# Altium PCB Telemetry_Module_old.PcbDoc (part 1 of 2)
Units mm, origin at the board's own origin, x right, y up, seen from the top; angles counter-clockwise.
Board outline 50 x 50 mm, 4 copper layers (Top Layer, GND, Power, Bottom Layer), stack 0.603 mm thick; 94 components, 68 nets, 386 pads, 193 vias.
Unrouted connection lines stored in the file: 22.
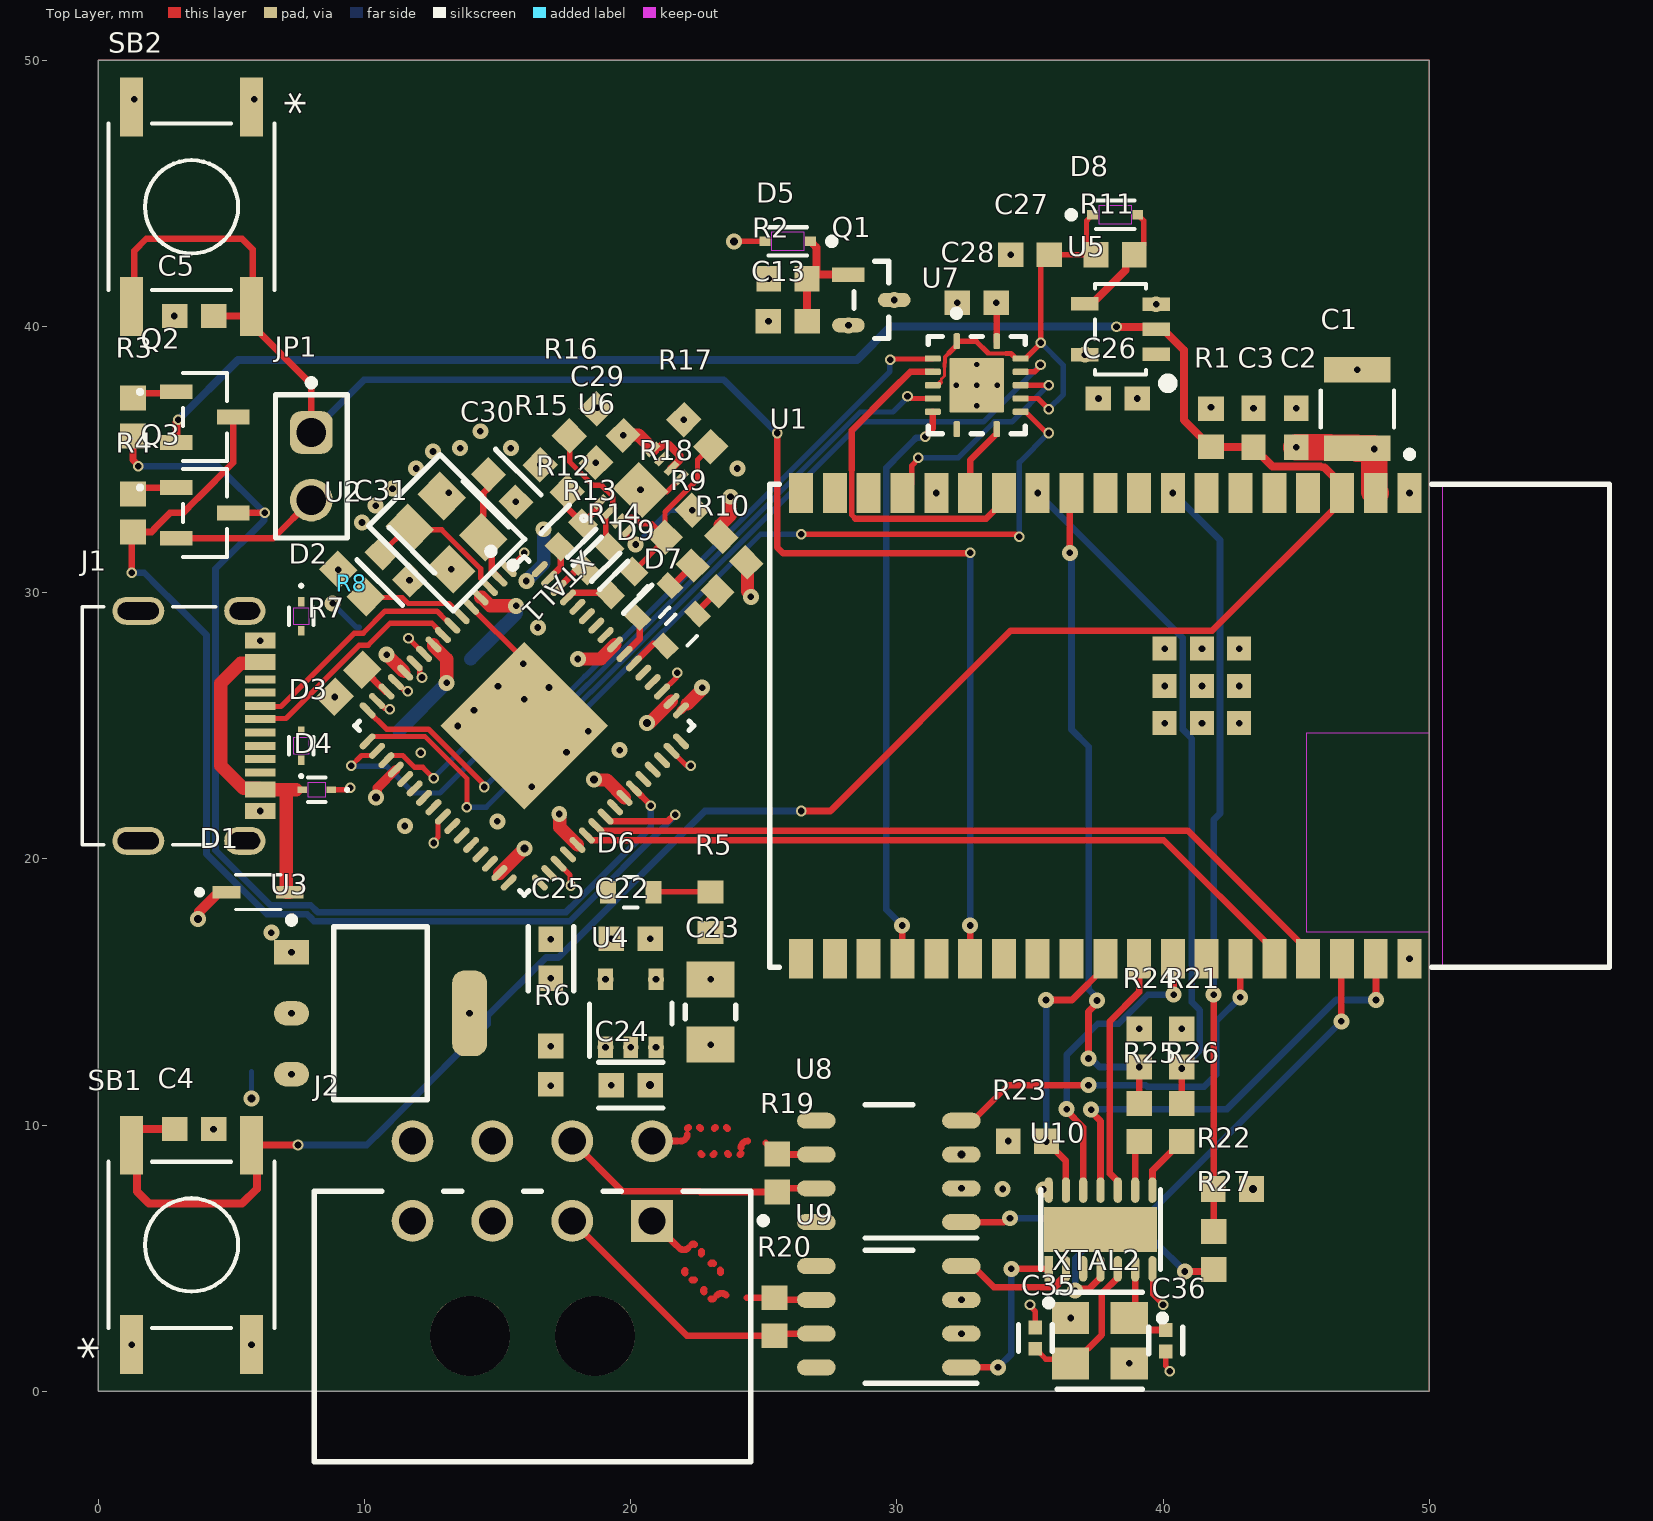
[diagram p0: Top Layer view]
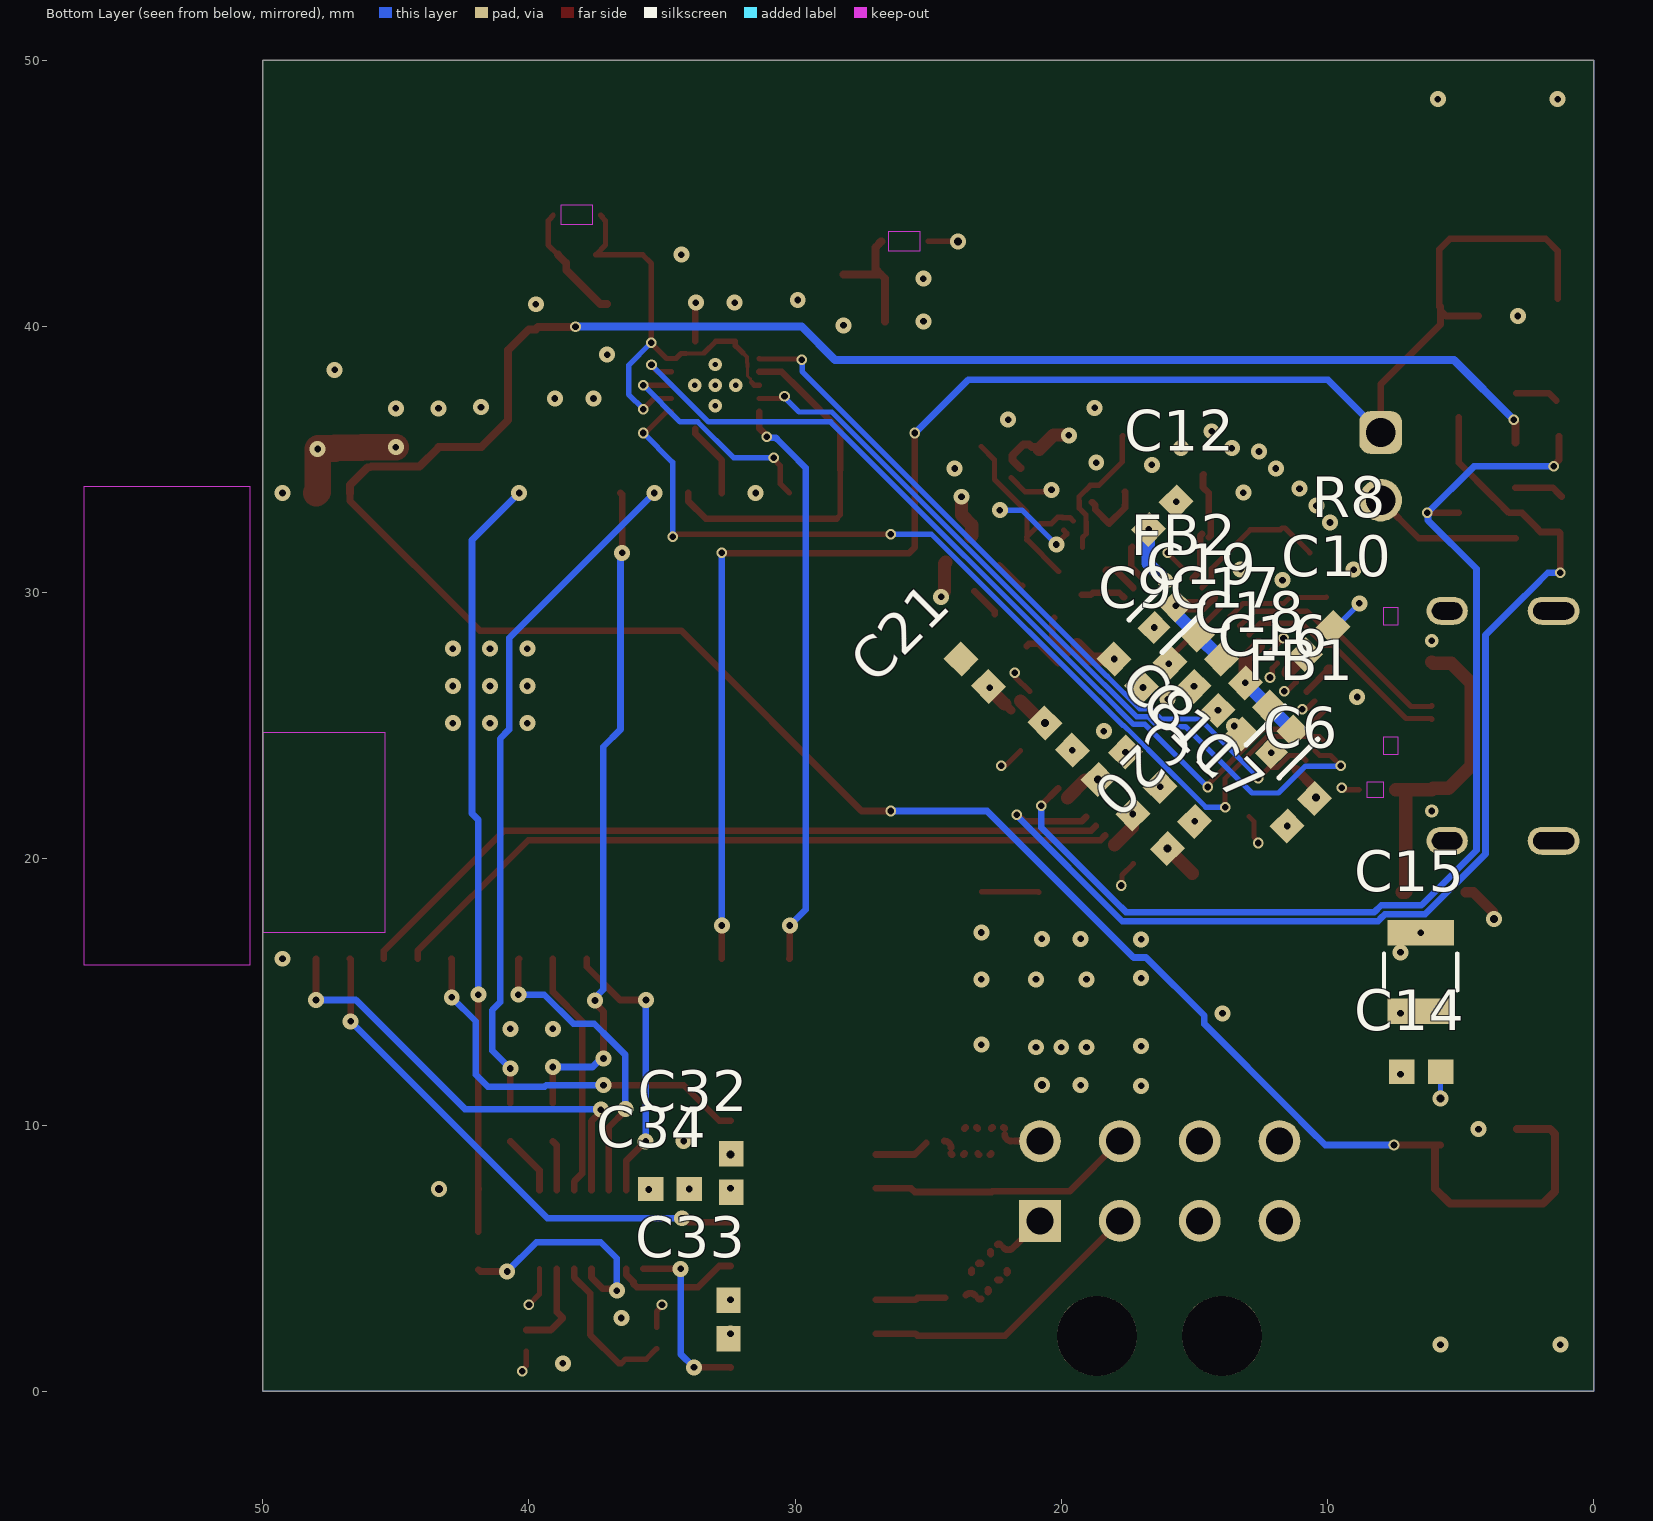
[diagram p1: Bottom Layer view, seen from below]
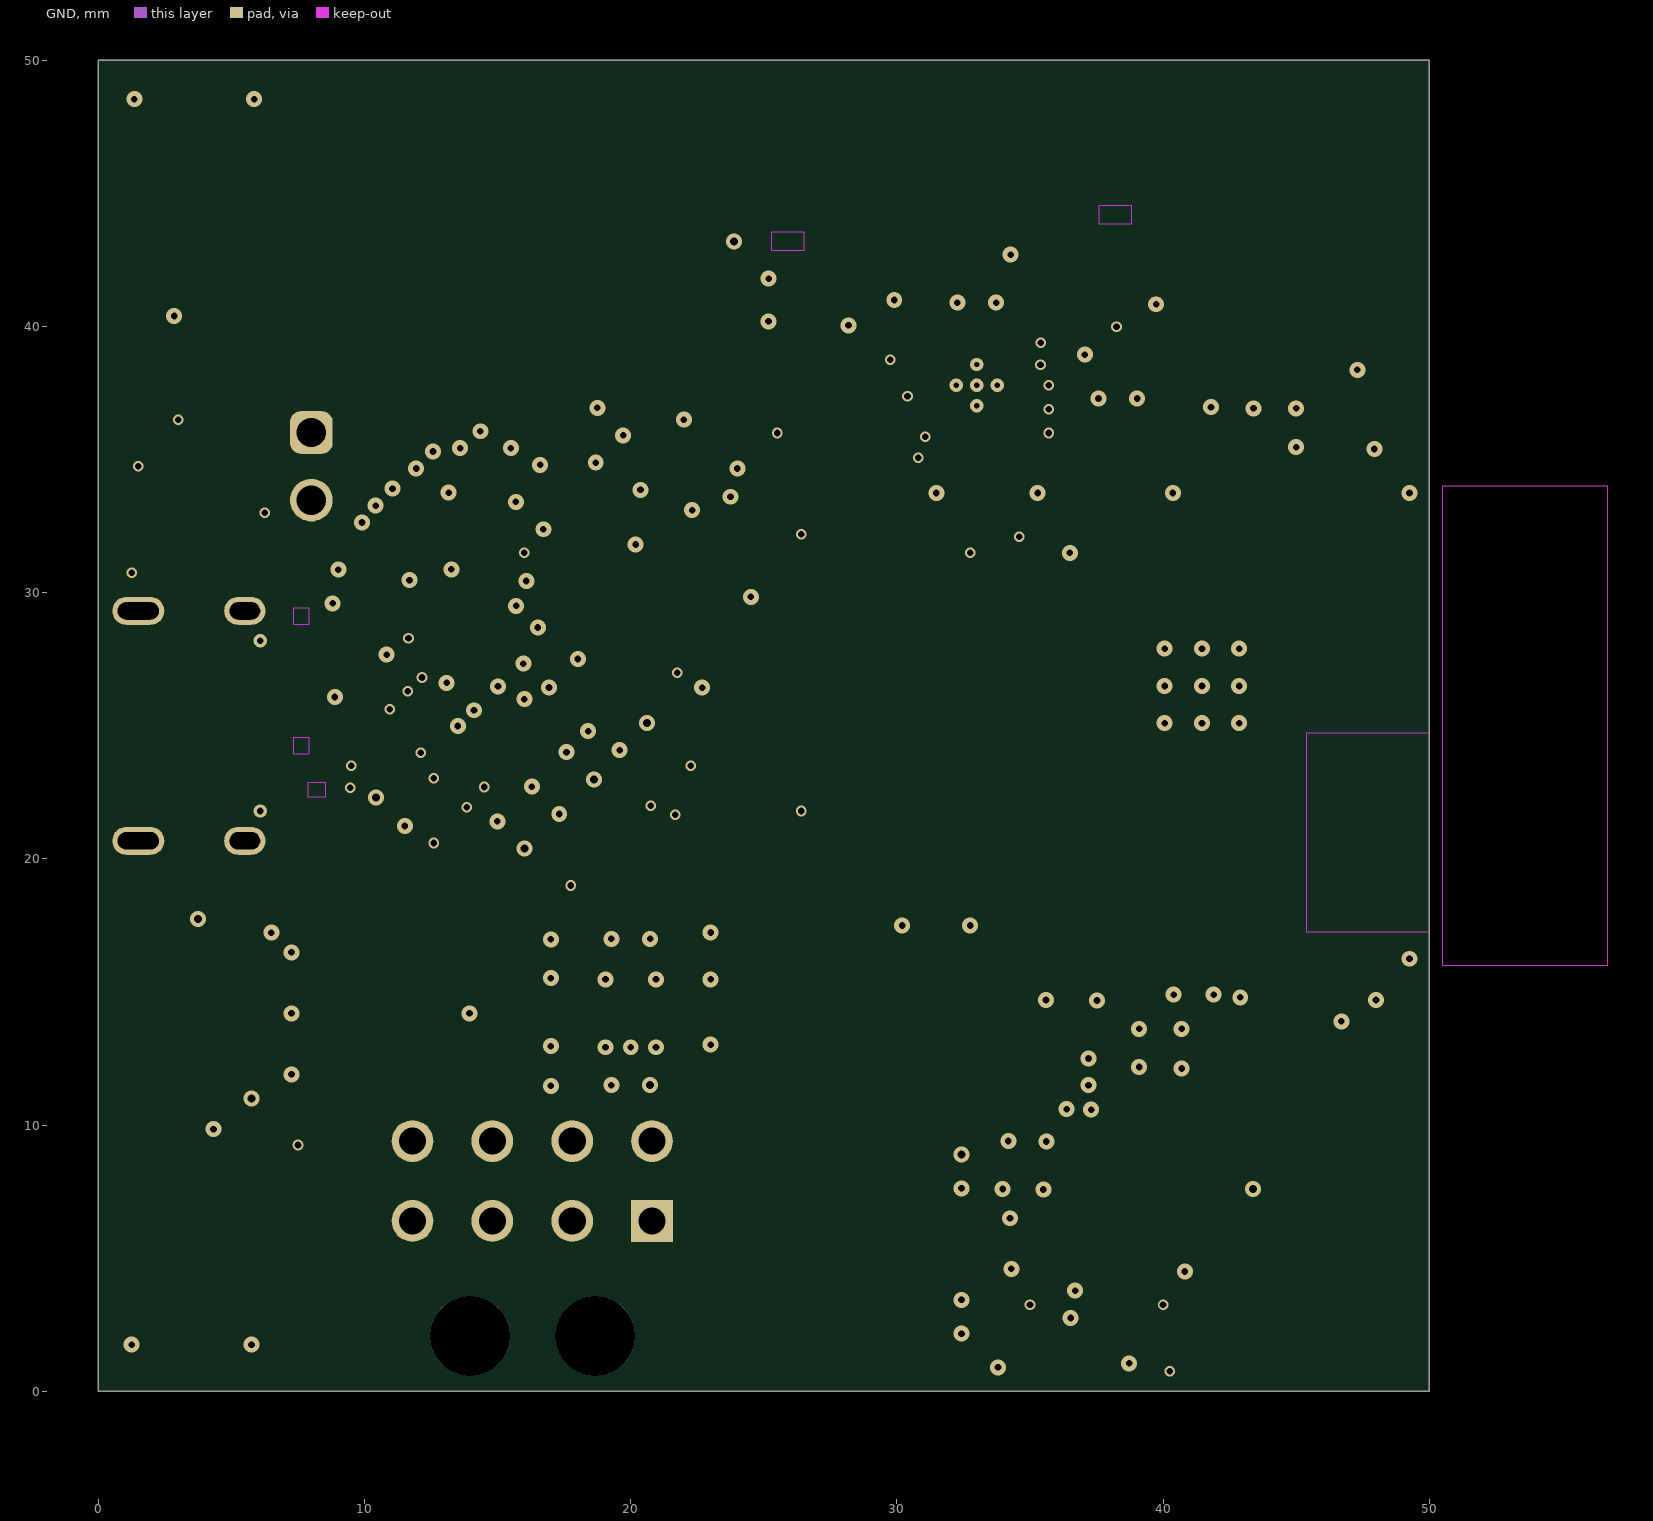
[diagram p2: GND]
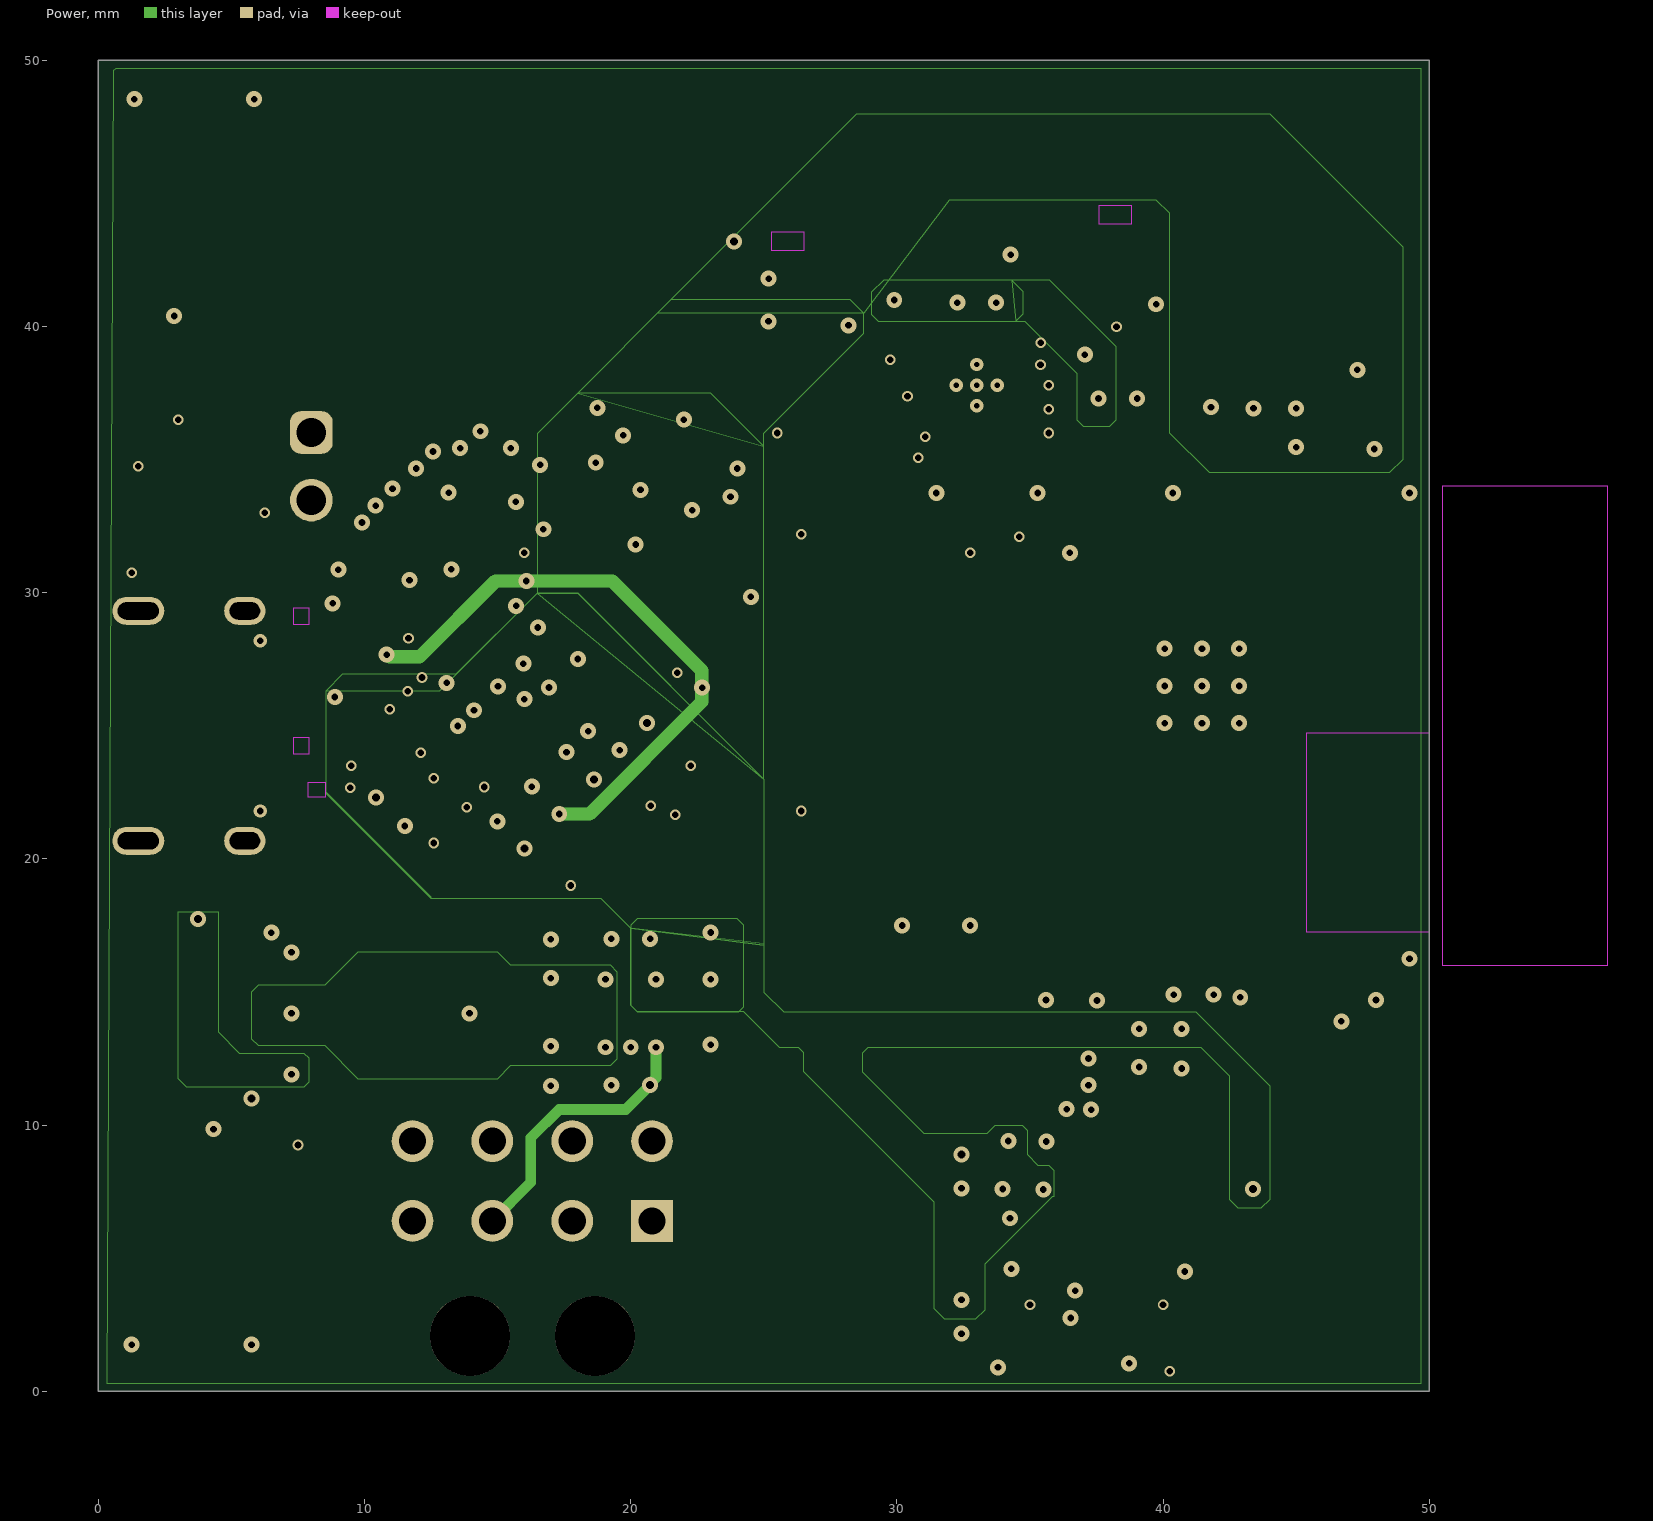
[diagram p3: Power]
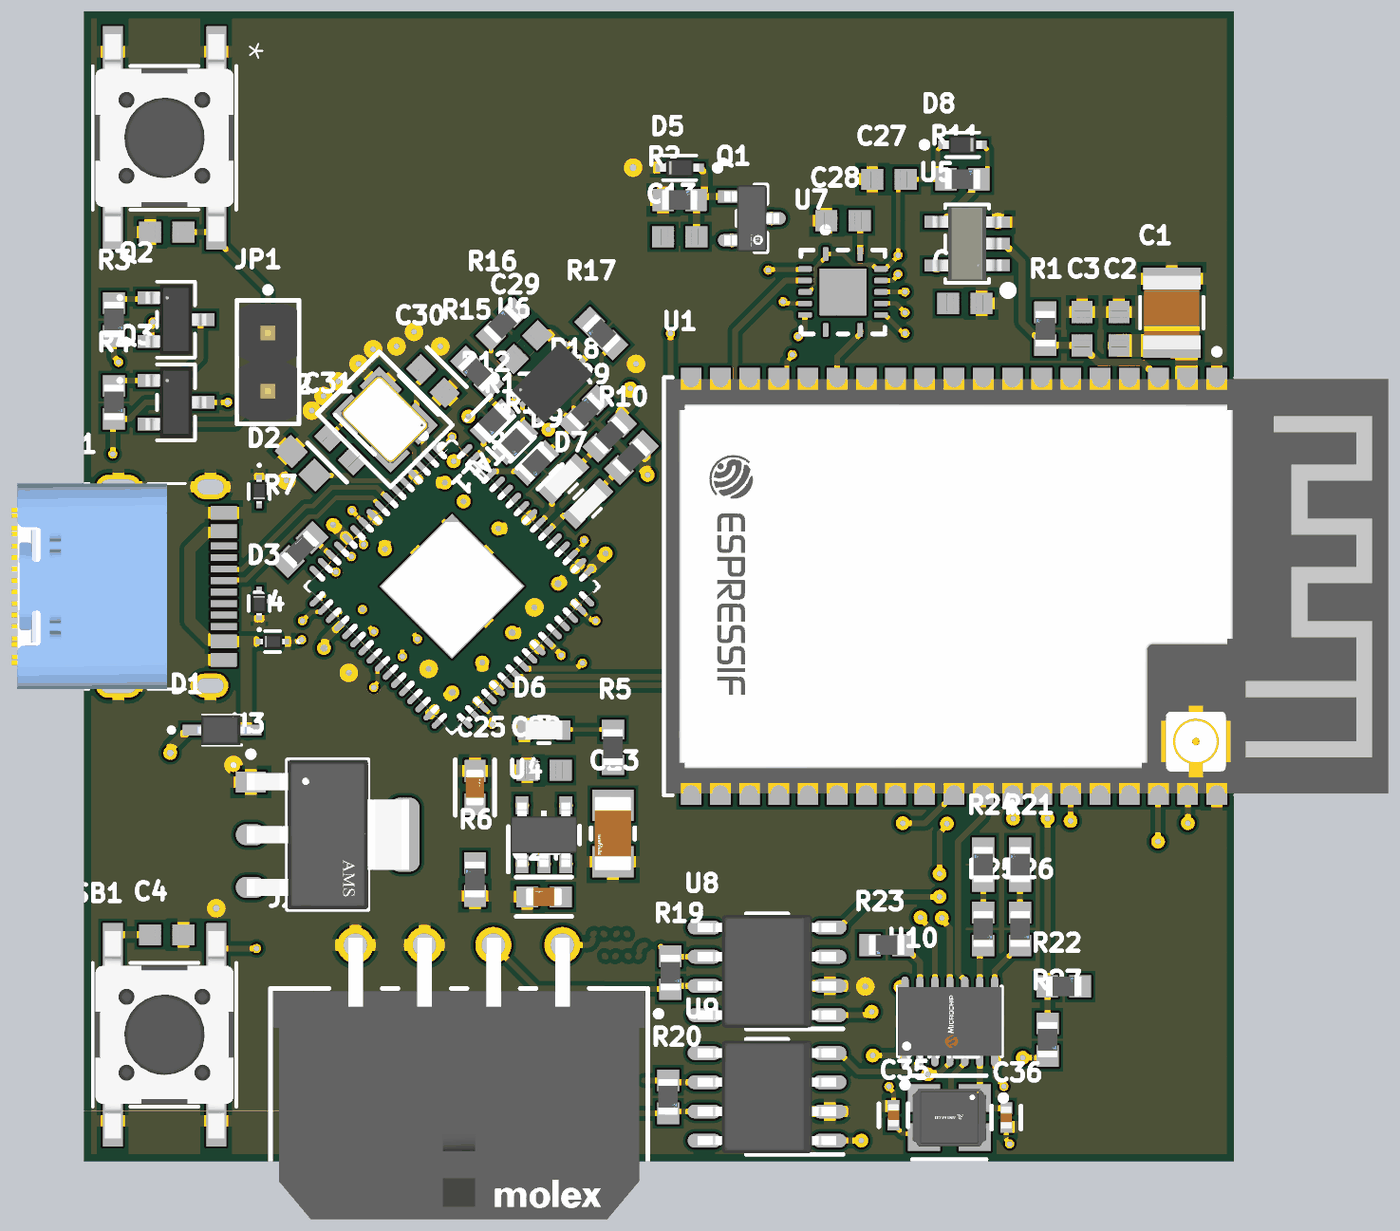
[diagram p5: 3D render of the assembled board from above, using the file's embedded part models]
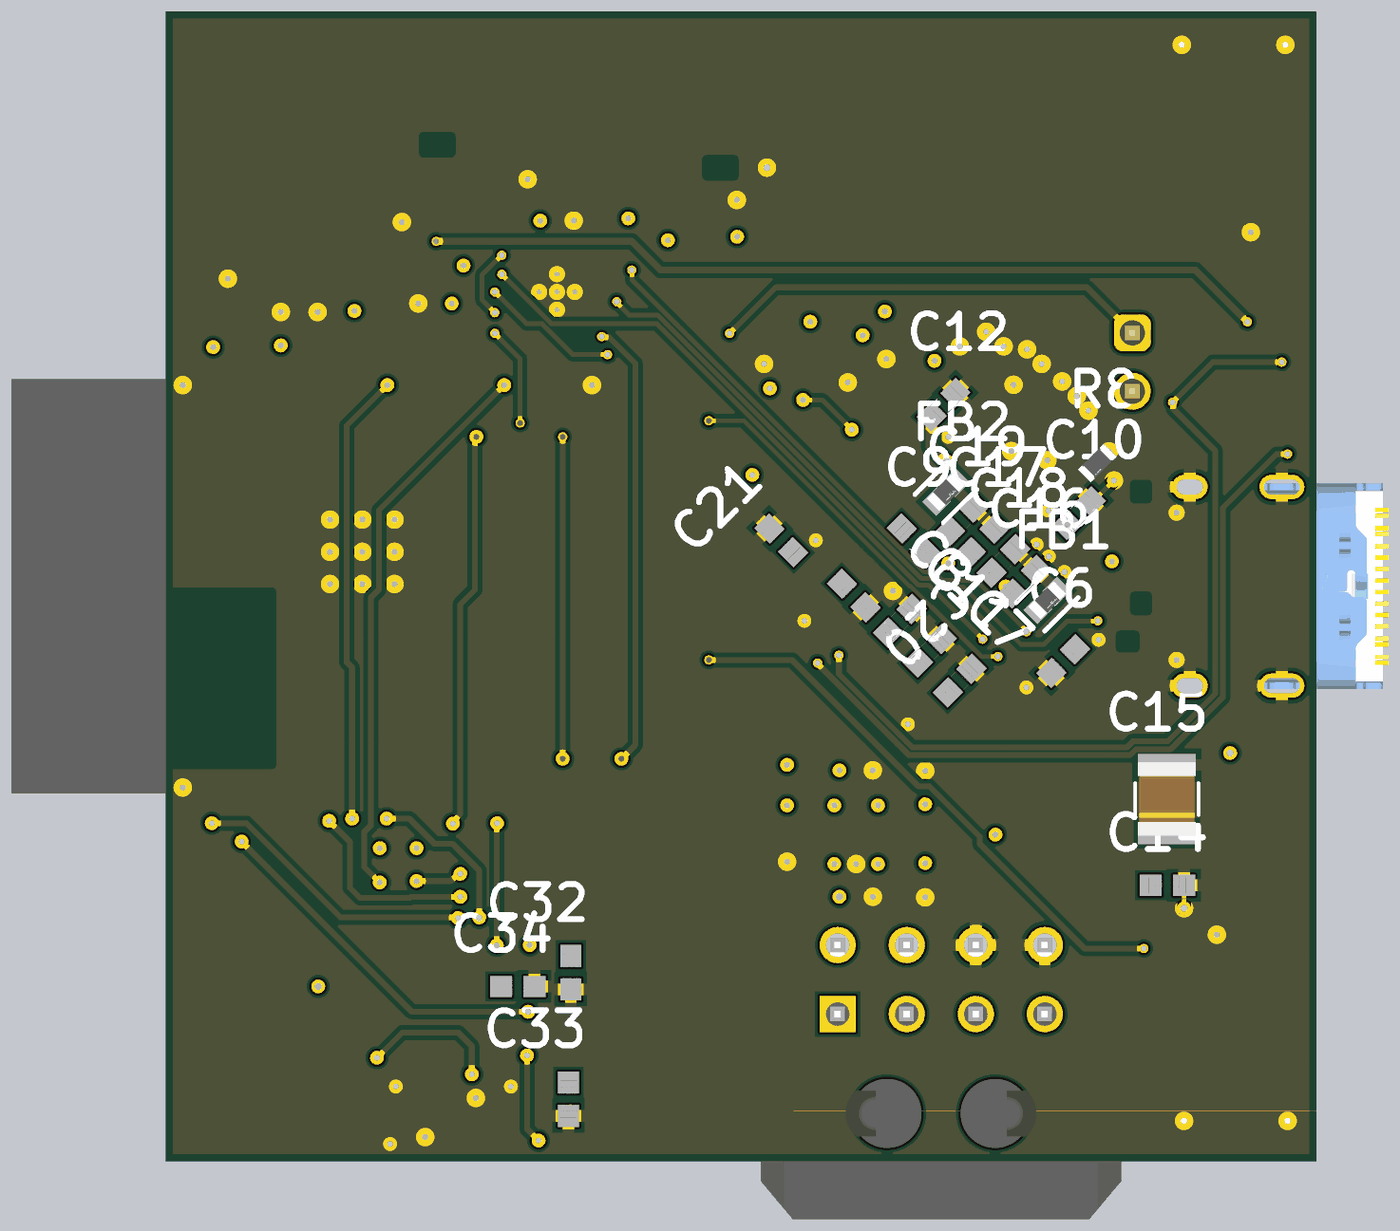
[diagram p6: 3D render of the assembled board from below, using the file's embedded part models]

## Layer stack, top to bottom
Top Solder: solder mask 0.0102, Solder Resist, Dk 3.5
Top Layer: signal copper 0.0356
Dielectric 2: prepreg 0.0711, PP-006, Dk 4.1
GND: signal copper 0.035
Dielectric 1: dielectric 0.32, FR-4, Dk 4.8
Power: signal copper 0.035
Dielectric 3: prepreg 0.0711, PP-006, Dk 4.1
Bottom Layer: signal copper 0.0356
Bottom Solder: solder mask 0.0102, Solder Resist, Dk 3.5

## Board outline
0,0 0,50 50,50 50,0

## Design rules (kind name [scope] priority, off if disabled: settings)
BoardOutlineClearance [All] p1: gap=0.3 ignorepadtopadclearanceinfootprint=FALSE except(0.4: Arc-SplitBarrior Arc-SplitContinuation Track-SplitBarrior Track-SplitContinuation SMDPad-SplitBarrior SMDPad-SplitContinuation THPad-SplitBarrior THPad-SplitContinuation Via-SplitBarrior Via-SplitContinuation Fill-SplitBarrior Fill-SplitContinuation Poly-SplitBarrior Poly-SplitContinuation Region-SplitBarrior Region-SplitContinuation Text-SplitBarrior Text-SplitContinuation)
Clearance "Clearance Different Nets" [All] p1: gap=0.2 ignorepadtopadclearanceinfootprint=TRUE except(0.089: Arc-Arc Arc-Track Arc-SMDPad Track-Track Track-SMDPad; 0.127: SMDPad-SMDPad SMDPad-Via THPad-Via Via-Via; 0.254: Arc-Via Arc-Text Track-Via Track-Text SMDPad-Text THPad-Text Via-Text Fill-Text Poly-Text Region-Text Text-Text; 0.5: THPad-THPad Via-Hole)
Clearance "Clearance Same Nets" [All] p2: gap=0.127 ignorepadtopadclearanceinfootprint=TRUE except(0: SMDPad-Via SMDPad-Hole)
Clearance "Clearance Bottom Layer" [OnLayer('Bottom Layer')] p3: gap=0.203 ignorepadtopadclearanceinfootprint=TRUE except(0.254: Arc-Text Track-Text SMDPad-Text THPad-Text Via-Text Fill-Text Poly-Text Region-Text Text-Text)
Clearance "Clearance Top Layer" [OnLayer('Top Layer')] p4: gap=0.203 ignorepadtopadclearanceinfootprint=TRUE except(0.254: Arc-Text Track-Text SMDPad-Text THPad-Text Via-Text Fill-Text Poly-Text Region-Text Text-Text)
DiffPairsRouting [All] p1: maxlimit=0.254 minlimit=0.254 mostfreqgap=0.254 toplayer_minwidth=0.089 toplayer_maxwidth=0.5 toplayer_prefwidth=0.381 midlayer1_minwidth=0.089 midlayer1_maxwidth=0.5 midlayer1_prefwidth=0.381 midlayer2_minwidth=0.089 midlayer2_maxwidth=0.5 midlayer2_prefwidth=0.381 bottomlayer_minwidth=0.089 bottomlayer_maxwidth=0.5 bottomlayer_prefwidth=0.381 maxuncoupledlength=12.7
HoleSize [All] p1: absolutevalues=TRUE maxlimit=6.3 minlimit=0.2 maxpercent=80.000 minpercent=20.000
MinimumAnnularRing [All] p1: minimumring=0.13
MinimumSolderMaskSliver [All] p1: minsoldermaskwidth=0.1
PolygonConnect PolygonConnect_1 [All] p1: thpad.connectstyle=Relief thpad.reliefconductorwidth=0.508 thpad.reliefentries=4 thpad.polygonreliefangle="90 Angle" thpad.airgapwidth=0.254 smdpad.connectstyle=Relief smdpad.reliefconductorwidth=0.508 smdpad.reliefentries=4 smdpad.polygonreliefangle="90 Angle" smdpad.airgapwidth=0.254 via.connectstyle=Direct via.reliefconductorwidth=0.508 via.reliefentries=4 via.polygonreliefangle="90 Angle" via.airgapwidth=0.254
RoutingCorners [All] p1: cornerstyle=Round minsetback=2.54 maxsetback=2.54
RoutingVias [All] p1: holewidth=0.25 width=0.6 viastyle="Through Hole" minholewidth=0.2 minwidth=0.35 maxholewidth=1 maxwidth=2
SilkToSilkClearance [All] p1: silktosilkclearance=0.1
SilkToSolderMaskClearance [IsPad] p1: minsilkscreentomaskgap=0.1 clearancetoexposedcopper=TRUE
SolderMaskExpansion [All] p1: expansion=0.102 istentingtop=FALSE
SupplyNets "Schematic Supply Nets_7" [InNet('3V3_D')] p1: voltage=0.000
SupplyNets "Schematic Supply Nets_6" [InNet('GND')] p2: voltage=0.000
SupplyNets "Schematic Supply Nets_5" [InNet('1V8')] p3: voltage=0.000
SupplyNets "Schematic Supply Nets_4" [InNet('USB_VBUS')] p4: voltage=0.000
SupplyNets "Schematic Supply Nets_3" [InNet('EXT_3V3')] p5: voltage=0.000
SupplyNets "Schematic Supply Nets_2" [InNet('USB_5V')] p6: voltage=0.000
SupplyNets "Schematic Supply Nets_1" [InNet('3V3')] p7: voltage=0.000
SupplyNets "Schematic Supply Nets" [InNet('USB_3V3')] p8: voltage=0.000
Width [All] p1: maxlimit=2.54 minlimit=0.089 preferedwidth=0.381
24 further rules are at their usual default settings.

## Classes and differential pairs
component class ESP32: C1 C2 C3 C4 C5 R1 SB1 SB2 U3
component class "FTDI USB to JTAG/UART": C6 C7 C8 C9 C10 C11 C12 C13 C14 C15 C16 C17 C19 C20 C21 C22 C23 C24 C25 C26 C27 C28 C29 C30 C31 D1 D2 D3 D4 D5 D6 D7 D8 D9 FB1 FB2 J1 JP1 Q1 Q2 Q3 R2 R3 R4 R5 R6 R7 R8 R9 R10 R11 R12 R13 R14 R15 R16 R17 R18 U3 U4 U5 U6 U7 XTAL1
component class "CAN Controllers": C32 C33 C34 C35 C36 J2 R19 R20 R22 R23 R24 R25 R26 R27 U8 U9 U10 XTAL2
differential pair USB_D: +USB_D_P -USB_D_N

## Components (designator, comment, footprint, x,y, rotation, side; value= is the part's Value field where it differs from the comment)
C1 "CL32A226KAJNNNE" CL32A226KAJNNNE-Footprint-1#1 47.3,36.9 r90 top value=22µF
C2 "CL10B104KB8WPNC" FP-CL10-IPC_B 45,36.2 r90 top value=100nF
C3 "CL10B104KB8WPNC" FP-CL10-IPC_B 43.4,36.2 r90 top value=100nF
C4 "CL10B104KB8WPNC" FP-CL10-IPC_B 3.6,9.85 r0 top value=100nF
C5 "CL10B104KB8WPNC" FP-CL10-IPC_B 3.6,40.4 r180 top value=100nF
C6 "CL10B104KB8WPNC" FP-CL10-IPC_B 11,21.75 r315 bottom value=100nF
C7 "CL10B104KB8WPNC" FP-CL10-IPC_B 15.5,20.9 r135 bottom value=100nF
C8 "CL10B104KB8WPNC" FP-CL10-IPC_B 18.1,23.5 r135 bottom value=100nF
C9 "CL10B104KB8WPNC" FP-CL10-IPC_B 17.5,27 r225 bottom value=100nF
C10 "CL10B104KB8WPNC" FP-CL10-IPC_B 10.314,28.186 r135 bottom value=100nF
C11 "CL10B104KB8WPNC" FP-CL10-IPC_B 16.8,22.2 r135 bottom value=100nF
C12 "CL10B104KB8WPNC" FP-CL10-IPC_B 16.2,32.9 r135 bottom value=100nF
C13 "CL10B105KA8NNNC" FP-CL10-IPC_B 25.9,40.2 r0 top value=1µF
C14 "CL10A106MQ8NNNC" FP-CL10-IPC_B 6.477,12 r180 bottom value=10µF
C15 "CL32A226KAJNNNE" CL32A226KAJNNNE-Footprint-1#2 6.5,15.75 r90 bottom value=22µF
C16 "CL10B104KB8WPNC" FP-CL10-IPC_B 12.7,25.2 r315 bottom value=100nF
C17 "CL10B104KB8WPNC" FP-CL10-IPC_B 14.5,27 r315 bottom value=100nF
C18 "CL10A475KA8NQNC" FP-CL10-IPC_B 13.6,26.1 r315 bottom value=4.7µF
C19 "CL10A475KA8NQNC" FP-CL10-IPC_B 15.4,27.9 r315 bottom value=4.7µF
C20 "CL10A475KA8NQNC" FP-CL10-IPC_B 20.1,24.6 r225 bottom value=4.7µF
C21 "CL10A475KA8NQNC" FP-CL10-IPC_B 23.25,27 r45 bottom value=4.7µF
C22 "CL10B105KA8NNNC" FP-CL10-IPC_B 20,17 r180 top value=1µF
C23 "GRM31CR60J227ME11K" FP-GRM31C-0_3-e0_3_0_9-IPC_C 23,14.25 r270 top value=220µF
C24 "GCM188R71E224KA55D" FP-GCM188-0_1-IPC_B 20,11.5 r180 top value=220nF
C25 "GCM188R71E224KA55D" FP-GCM188-0_1-IPC_B 17,16.25 r90 top value=220nF
C26 "CL10B104KB8WPNC" FP-CL10-IPC_B 38.3,37.3 r0 top value=100nF
C27 "CL10B105KA8NNNC" FP-CL10-IPC_B 35,42.7 r180 top value=1µF
C28 "CL10B104KB8WPNC" FP-CL10-IPC_B 33,40.9 r180 top value=100nF
C29 "CL10B104KB8WPNC" FP-CL10-IPC_B 19.2,35.4 r225 top value=100nF
C30 "CL10C120JB81PNC" FP-CL10-IPC_B 15.17,33.93 r315 top value=12pF
C31 "CL10C120JB81PNC" FP-CL10-IPC_B 11.176,30.988 r315 top value=12pF
C32 "CL10B104KB8WPNC" FP-CL10-IPC_B 32.4,8.2 r270 bottom value=100nF
C33 "CL10B104KB8WPNC" FP-CL10-IPC_B 32.5,2.7 r270 bottom value=100nF
C34 "CL10B104KB8WPNC" FP-CL10-IPC_B 34.7,7.6 r180 bottom value=100nF
C35 "C0402C180J3GACAUTO" FP-C0402-BB-MFG 35.2,2 r90 top value=18pF
C36 "C0402C180J3GACAUTO" FP-C0402-BB-MFG 40.1,1.9 r270 top value=18pF
D1 "BAT760-7" SOD2513X120N 6,18.75 r0 top
D2 "CPDQ5V0-HF" CPDQ5V0-HF-Footprint-1 7.62,29.121 r270 top
D3 "CPDQ5V0" CPDQ5V0-HF-Footprint-1 7.62,24.257 r90 top
D4 "CPDQ5V0-HF" CPDQ5V0-HF-Footprint-1 8.2,22.6 r180 top
D5 "CDBQR0130R" CDBQR0130R-Footprint-1 25.9,43.2 r180 top
D6 "TLMS1100" TLMS1100-GS15-Footprint-1 20,18.75 r0 top
D7 "TLMO1100-GS15" TLMS1100-GS15-Footprint-1 21.9,28.6 r45 top
D8 "CDBQR0130R" CDBQR0130R-Footprint-1 38.2,44.2 r0 top
D9 "TLMG1100-GS15" TLMS1100-GS15-Footprint-1 20.865,29.665 r45 top
FB1 "BLM18SP102SH1D" FP-BLM18-0_15-t0_8-IPC_C 11.7,24.4 r135 bottom
FB2 "BLM18SP102SH1D" FP-BLM18-0_15-t0_8-IPC_C 16.1,29.1 r135 bottom
J1 "10171746-00021LF" AMPHENOL_10171746-00021LF 1.5,25 r270 top
J2 "43045-0802" FP-43045-0802-MFG 16.31,2.435 r0 top
JP1 "61300211121" 61300211121 8,34.75 r270 top
Q1 "NVR5124PLT1G" FP-318-08-IPC_C 29.04,41 r0 top
Q2 "MMS8050HE3-H-TP" MMS8050HE3-H-TP-Footprint-1 4,36.6 r270 top
Q3 "MMS8050HE3-H-TP" MMS8050HE3-H-TP-Footprint-1 4,33 r270 top
R1 "CRCW060310K0FKEA" FP-CRCW0603-e3-IPC_B 41.8,36.2 r90 top value=10k
R2 "CRCW060310K0FKEA" FP-CRCW0603-e3-IPC_B 25.9,41.8 r0 top value=10k
R3 "CRCW060310K0FKEA" FP-CRCW0603-e3-IPC_B 1.3,36.6 r270 top value=10k
R4 "CRCW060310K0FKEA" FP-CRCW0603-e3-IPC_B 1.3,33 r270 top value=10k
R5 "RCS060362R0FKEA" RESC1508X50N 23,18 r270 top value=62
R6 "CRCW060310K0FKEA" FP-CRCW0603-e3-IPC_B 17,12.25 r90 top value=10k
R7 "ERA-3AEB123V" FP-ERA3A-IPC_B 9.4,26.6 r45 top value=12k
R8 "ERA-3AEB123V" FP-ERA3A-IPC_B 9.525,30.353 r315 top value=12k
R9 "RCS060362R0FKEA" RESC1508X50N 22.865,31.565 r45 top value=62
R10 "RCS060362R0FKEA" RESC1508X50N 23.8,30.6 r45 top value=62
R11 "CRCW060310K0FKEA" FP-CRCW0603-e3-IPC_B 38.2,42.7 r0 top value=10k
R12 "CRCW060333R0FKEA" FP-CRCW0603-e3-IPC_C 17.765,32.165 r225 top value=33
R13 "CRCW060333R0FKEA" FP-CRCW0603-e3-IPC_C 18.765,31.265 r225 top value=33
R14 "CRCW060333R0FKEA" FP-CRCW0603-e3-IPC_C 19.665,30.365 r225 top value=33
R15 "CRCW060310K0FKEA" FP-CRCW0603-e3-IPC_B 17.1,34.3 r135 top value=10k
R16 "CRCW060310K0FKEA" FP-CRCW0603-e3-IPC_B 18.2,36.4 r45 top value=10k
R17 "CRCW060310K0FKEA" FP-CRCW0603-e3-IPC_B 22.5,36 r135 top value=10k
R18 "CRCW06032K20FKEA" FP-CRCW0603-e3-IPC_B 21.8,32.6 r45 top value=2.2k
R19 "CRCW0603120RFKTA" FP-CRCW0603-e3-IPC_B 25.5,8.2 r270 top value=120
R20 "CRCW0603120RFKTA" FP-CRCW0603-e3-IPC_B 25.4,2.8 r270 top value=120
R21 "CRCW060310K0FKEA" FP-CRCW0603-e3-IPC_B 40.7,12.9 r90 top value=10k
R22 "CRCW060310K0FKEA" FP-CRCW0603-e3-IPC_B 42.6,7.6 r0 top value=10k
R23 "CRCW060310K0FKEA" FP-CRCW0603-e3-IPC_B 34.9,9.4 r180 top value=10k
R24 "CRCW060310K0FKEA" FP-CRCW0603-e3-IPC_B 39.1,12.9 r90 top value=10k
R25 "CRCW06030000Z0EA" FP-CRCW0603-e3-IPC_B 39.1,10.1 r270 top
R26 "CRCW06030000Z0EA" FP-CRCW0603-e3-IPC_B 40.7,10.1 r270 top value=0
R27 "CRCW06030000Z0EA" FP-CRCW0603-e3-IPC_B 41.9,5.285 r270 top value=0
SB1 "PTS645SK43SMTR92LFS" PTS645SK43SMTR92LFS-Footprint-1 3.5,5.5 r90 top
SB2 "PTS645SK43SMTR92LFS" PTS645SK43SMTR92LFS-Footprint-1 3.5,44.5 r270 top
U1 "ESP32-WROVER-IE" FP-ESP32-WROVER-IE_M213EH-MFG 41,25 r270 top
U2 "FT2232HQ" FP-FT2232HQ-Reel-MFG 16,25 r315 top
U3 "AMS1117-3.3" FP-AMS1117-IPC_B 10.6,14.2 r0 top
U4 "TPS2105DBVR" TPS2105DBVR-Footprint-1 20,14.2 r90 top
U5 "MC74VHC1GT04DFT2G-Q" MC74VHC1GT04DFT2G-Q-Footprint-1 38.4,39.9 r180 top
U6 "AT93C46DY6-YH-E" AT93C46DY6-YH-E-Footprint-1 20.365,33.865 r45 top
U7 "SN74AHC125RGYR" RGY0014A_V 33,37.8 r270 top
U8 "TCAN332GDR" TCAN332GDR-Footprint-1 29.7,8.259 r180 top
U9 "TCAN332GDR" TCAN332GDR-Footprint-1 29.7,2.8 r180 top
U10 "MCP2518FDT-H/QBB" FP-C04-21361-IPC_A 37.65,6.078 r90 top
XTAL1 "7M1MAAE" FP-7M-MFG 13.081,32.258 r135 top
XTAL2 "ABM8G-20" FP-ABM8G-MFG 37.625,1.9 r180 top

## Footprints (in the part's own frame and the unit in brackets; to place one, negate y for a bottom-side part, rotate by r counter-clockwise, add the part's x,y. Pads: shape width x height; smd on the part's side, far side on the other; paste and mask are expansions set on the pad)
61300211121 [mm] "Pin Header, pitch 2.54 mm, THT, Vertical, single row, 2p"
  rrect50% 1.6x1.6 hole 1.1: 1(-1.27,0)
  round 1.6 hole 1.1: 2(1.27,0)
  silkscreen extent -3.26,-1.35 2.69,1.35, body extent -2.54,-1.27 2.54,1.27, height 8.57
AMPHENOL_10171746-00021LF [mm]
  rect 0.6x1.15 smd: A1_B12(-3.2,4.575) A4_B9(-2.4,4.575) B1_A12(3.2,4.575) B4_A9(2.4,4.575)
  rect 0.3x1.15 smd: A5(-1.25,4.575) A6(-0.25,4.575) A7(0.25,4.575) A8(1.25,4.575) B5(1.75,4.575) B6(0.75,4.575) B7(-0.75,4.575) B8(-1.75,4.575)
  oval 1.05x1.55 hole 0.65 slot 1.15 at 90 deg: SH1(-4.32,4) SH2(4.32,4)
  oval 1.05x1.95 hole 0.65 slot 1.55 at 90 deg: SH3(-4.32,0) SH4(4.32,0)
  silkscreen extent -4.47,-2.1 4.47,2.91, body extent -4.47,-2.1 4.47,4.65, height 3.26
AT93C46DY6-YH-E-Footprint-1 [mm]
  rect 0.603x0.249 smd: 1(-1.402,0.75) 2(-1.402,0.25) 3(-1.402,-0.25) 4(-1.402,-0.75) 5(1.402,-0.75) 6(1.402,-0.25) 7(1.402,0.25) 8(1.402,0.75)
  rect 1.4x1.6 smd: 9(0,0)
  silkscreen extent -2.36,0.65 -2.15,0.85, body extent -1.5,-1 1.5,1, height 0.6
CDBQR0130R-Footprint-1 [mil]
  rect 16x14 smd: 1(-33.5,0) 2(33.5,0)
  Top Layer keep-out region: -23.5,-14 -23.5,14 23.5,14 23.5,-14
  Keep-Out Layer region: -23.5,-14 -23.5,14 23.5,14 23.5,-14
  silkscreen extent -70,-21 28,21, body extent -34,-16 34,16, height 28
CL32A226KAJNNNE-Footprint-1#1 [mm]
  rect 0.956x2.5 smd: 1(-1.478,0) 2(1.478,0)
  silkscreen extent -0.69,-1.38 0.69,1.38, body extent -1.6,-1.25 1.6,1.25, height 1
CL32A226KAJNNNE-Footprint-1#2 [mm]
  rect 0.956x2.5 smd paste+0 mask+0: 1(-1.478,0) 2(1.478,0)
  silkscreen extent -0.69,-1.38 0.69,1.38, body extent -1.6,-1.25 1.6,1.25, height 1
CPDQ5V0-HF-Footprint-1 [mil]
  rect 14x10 smd: 1(-21.5,0) 2(21.5,0)
  Top Layer keep-out region: -12.5,-11 -12.5,11 12.5,11 12.5,-11
  Keep-Out Layer region: -12.5,-11 -12.5,11 12.5,11 12.5,-11
  silkscreen extent -47,-18 13,18, body extent -21,-13 21,13, height 32
FP-7M-MFG [mm]
  rect 1.4x1.2 smd: 1(-1.1,-0.85) 2(1.1,-0.85) 3(1.1,0.85) 4(-1.1,0.85)
  silkscreen extent -2.75,-1.9 2.25,1.9, body extent -1.6,-1.25 1.6,1.25, height 0.8
FP-318-08-IPC_C [mm]
  rect 1.224x0.538 smd: 1(-0.86,0.95)
  rrect100% 1.224x0.538 smd: 2(-0.86,-0.95) 3(0.86,0)
  silkscreen extent -0.65,-1.45 0.65,1.45, body extent -1.57,-1.55 1.57,1.55, height 0.25
FP-43045-0802-MFG [mm]
  rect 1.57x1.57 hole 1.02: 1(4.49,3.965)
  round 1.57 hole 1.02: 2(1.49,3.965) 3(-1.51,3.965) 4(-4.51,3.965) 5(4.49,6.965) 6(1.49,6.965) 7(-1.51,6.965) 8(-4.51,6.965)
  round 3 hole 3 unplated: ""(-2.35,-0.355) ""(2.35,-0.355)
  silkscreen extent -8.2,-5.08 8.8,5.08, body extent -8.3,-5.18 8.3,7.85, height 0.25
FP-ABM8G-MFG [mm]
  rect 1.4x1.2 smd: 1(-1.1,-0.85) 2(1.1,-0.85) 3(1.1,0.85) 4(-1.1,0.85)
  silkscreen extent -2.48,-1.83 1.6,1.82, body extent -1.9,-1.55 1.9,1.55, height 0.25
FP-AMS1117-IPC_B [mm]
  rect 1.304x0.912 smd: 1(-3.345,2.29)
  rrect100% 1.304x0.912 smd: 2(-3.345,0) 3(-3.345,-2.29)
  rrect70% 1.304x3.222 smd: 4(3.345,0)
  silkscreen extent -3.47,-3.25 1.75,3.62, body extent -4.25,-3.5 4.25,3.5, height 0.25
FP-BLM18-0_15-t0_8-IPC_C [mm]
  rect 0.906x0.858 smd paste+0 mask+0: 1(-0.576,0) 2(0.576,0)
  silkscreen extent -1.03,-0.88 1.03,0.87, body extent -0.8,-0.4 0.8,0.4, height 0.95
FP-C04-21361-IPC_A [mm]
  rect 0.956x0.312 smd: 1(-1.478,1.95)
  rrect100% 0.956x0.312 smd: 2(-1.478,1.3) 3(-1.478,0.65) 4(-1.478,0) 5(-1.478,-0.65) 6(-1.478,-1.3) 7(-1.478,-1.95) 8(1.478,-1.95) 9(1.478,-1.3) 10(1.478,-0.65) 11(1.478,0) 12(1.478,0.65) 13(1.478,1.3) 14(1.478,1.95)
  rect 1.7x4.25 smd: 15(0,0)
  silkscreen extent -2.88,-2.25 1.5,2.25, body extent -2.46,-2.75 2.46,2.75, height 0.25
FP-C0402-BB-MFG [mm]
  rect 0.52x0.52 smd: 1(-0.4,0) 2(0.4,0)
  silkscreen extent -0.5,-0.64 0.5,0.63, body extent -0.8,-0.4 0.8,0.4, height 0.25
FP-CL10-IPC_B [mm]
  rect 0.958x0.912 smd: 1(-0.727,0) 2(0.727,0)
  body extent -1.46,-0.71 1.46,0.71, height 0.25
FP-CRCW0603-e3-IPC_B [mm]
  rect 0.935x0.962 smd: 1(-0.715,0) 2(0.715,0)
  body extent -1.43,-0.73 1.43,0.73, height 0.25
FP-CRCW0603-e3-IPC_C [mm]
  rect 0.735x0.862 smd: 1(-0.615,0) 2(0.615,0)
  silkscreen extent -0.75,-0.85 0.75,0.85, body extent -1.08,-0.58 1.08,0.58, height 0.25
FP-ERA3A-IPC_B [mm]
  rect 1.055x1.006 smd: 1(-0.726,0) 2(0.726,0)
  body extent -1.5,-0.75 1.5,0.75, height 0.25
FP-ESP32-WROVER-IE_M213EH-MFG [mm]
  rect 1.5x0.9 smd: 1(-8.75,8.26) 2(-8.75,6.99) 3(-8.75,5.72) 4(-8.75,4.45) 5(-8.75,3.18) 6(-8.75,1.91) 7(-8.75,0.64) 8(-8.75,-0.63) 9(-8.75,-1.9) 10(-8.75,-3.17) 11(-8.75,-4.44) 12(-8.75,-5.71) 13(-8.75,-6.98) 14(-8.75,-8.25) 15(-8.75,-9.52) 16(-8.75,-10.79) 17(-8.75,-12.06) 18(-8.75,-13.33) 19(-8.75,-14.6) 20(8.75,-14.6) 21(8.75,-13.33) 22(8.75,-12.06) 23(8.75,-10.79) 24(8.75,-9.52) 25(8.75,-8.25) 26(8.75,-6.98) 27(8.75,-5.71) 28(8.75,-4.44) 29(8.75,-3.17) 30(8.75,-1.9) 31(8.75,-0.63) 32(8.75,0.64) 33(8.75,1.91) 34(8.75,3.18) 35(8.75,4.45) 36(8.75,5.72) 37(8.75,6.99) 38(8.75,8.26)
  rect 0.9x0.9 smd: 39(-2.9,1.86) 39(-2.9,-0.94) 39(-2.9,0.46) 39(-1.5,1.86) 39(-1.5,0.46) 39(-1.5,-0.94) 39(-0.1,1.86) 39(-0.1,0.46) 39(-0.1,-0.94)
  Keep-Out Layer region: -9,9.48 9,9.48 9,15.7 -9,15.7
  Keep-Out Layer region: -9,9.48 9,9.48 9,15.7 -9,15.7
  silkscreen extent -10.32,-15.78 9.08,15.77, body extent -9.6,-15.88 9.6,15.87, height 0.25
FP-FT2232HQ-Reel-MFG [mm]
  rrect100% 0.75x0.25 smd: 1(-4.575,3.75) 2(-4.575,3.25) 3(-4.575,2.75) 4(-4.575,2.25) 5(-4.575,1.75) 6(-4.575,1.25) 7(-4.575,0.75) 8(-4.575,0.25) 9(-4.575,-0.25) 10(-4.575,-0.75) 11(-4.575,-1.25) 12(-4.575,-1.75) 13(-4.575,-2.25) 14(-4.575,-2.75) 15(-4.575,-3.25) 16(-4.575,-3.75) 33(4.575,-3.75) 34(4.575,-3.25) 35(4.575,-2.75) 36(4.575,-2.25) 37(4.575,-1.75) 38(4.575,-1.25) 39(4.575,-0.75) 40(4.575,-0.25) 41(4.575,0.25) 42(4.575,0.75) 43(4.575,1.25) 44(4.575,1.75) 45(4.575,2.25) 46(4.575,2.75) 47(4.575,3.25) 48(4.575,3.75)
  rrect100% 0.25x0.75 smd: 17(-3.75,-4.575) 18(-3.25,-4.575) 19(-2.75,-4.575) 20(-2.25,-4.575) 21(-1.75,-4.575) 22(-1.25,-4.575) 23(-0.75,-4.575) 24(-0.25,-4.575) 25(0.25,-4.575) 26(0.75,-4.575) 27(1.25,-4.575) 28(1.75,-4.575) 29(2.25,-4.575) 30(2.75,-4.575) 31(3.25,-4.575) 32(3.75,-4.575) 49(3.75,4.575) 50(3.25,4.575) 51(2.75,4.575) 52(2.25,4.575) 53(1.75,4.575) 54(1.25,4.575) 55(0.75,4.575) 56(0.25,4.575) 57(-0.25,4.575) 58(-0.75,4.575) 59(-1.25,4.575) 60(-1.75,4.575) 61(-2.25,4.575) 62(-2.75,4.575) 63(-3.25,4.575) 64(-3.75,4.575)
  rect 4.45x4.45 smd: 65(0,0)
  silkscreen extent -5.65,-4.5 4.5,4.5, body extent -5.05,-5.05 5.05,5.05, height 0.25
FP-GCM188-0_1-IPC_B [mm]
  rect 0.959x0.912 smd: 1(-0.727,0) 2(0.727,0)
  silkscreen extent -1.21,-0.86 1.21,0.86, body extent -1.46,-0.71 1.46,0.71, height 0.25
FP-GRM31C-0_3-e0_3_0_9-IPC_C [mm]
  rect 1.353x1.804 smd: 1(-1.225,0) 2(1.225,0)
  silkscreen extent -0.25,-0.95 0.25,0.95, body extent -1.6,-0.8 1.6,0.8, height 1.9
MC74VHC1GT04DFT2G-Q-Footprint-1 [mil]
  rect 40.5x20 smd: 1(-52.75,37) 2(-52.75,0) 3(-52.75,-37) 4(52.75,-37.5) 5(52.75,37.5)
  silkscreen extent -77,-67 37,87, body extent -59,-62 59,62, height 43
MMS8050HE3-H-TP-Footprint-1 [mil]
  rect 22x48 smd: 1(-37.4,-42) 2(37.4,-42) 3(0,42)
  silkscreen extent -65,-99 65,32, body extent -60,-52 60,52, height 43
PTS645SK43SMTR92LFS-Footprint-1 [mil]
  rect 87x34 smd: 1(-147.5,88.58) 2(147.5,88.58) 3(-147.5,-88.58) 4(147.5,-88.58)
  silkscreen extent -123,-123 123,123, body extent -177,-118 177,118, height 158
RESC1508X50N [mm]
  rect 0.86x0.98 smd: 1(-0.765,0) 2(0.765,0)
  body extent -0.77,-0.43 0.77,0.43, height 0.53
RGY0014A_V [mm] "QFN, 14-Leads, Body 3.5x3.5mm, Thermal Pad 2.05x2.05mm, TI Recommend"
  rrect42% 0.6x0.24 smd: 1(-1.65,-0.75) 7(1.65,-0.75) 8(1.65,0.75) 14(-1.65,0.75)
  rrect42% 0.24x0.6 smd: 2(-1,-1.65) 3(-0.5,-1.65) 4(0,-1.65) 5(0.5,-1.65) 6(1,-1.65) 9(1,1.65) 10(0.5,1.65) 11(0,1.65) 12(-0.5,1.65) 13(-1,1.65)
  rrect5% 2.05x2.05 smd: 15(0,0)
  round 0.025 on Top Paste: 15_1(-0.56,0.56) 15_2(0.56,0.56) 15_3(-0.56,-0.56) 15_4(0.56,-0.56)
  silkscreen extent -2.82,-1.83 1.82,1.83, body extent -1.75,-1.75 1.75,1.75, height 1
SOD2513X120N [mm]
  rect 1.04x0.46 smd: A(1.19,0) C(-1.19,0)
  silkscreen extent -2.3,-0.65 0.85,0.65, body extent -1.33,-0.65 1.25,0.65, height 1.21
TCAN332GDR-Footprint-1 [mm]
  oval 1.45x0.6 smd: 1(-2.725,1.905) 2(-2.725,0.635) 3(-2.725,-0.635) 4(-2.725,-1.905) 5(2.725,-1.905) 6(2.725,-0.635) 7(2.725,0.635) 8(2.725,1.905)
  silkscreen extent -3.3,-2.5 0.9,2.5, body extent -3.01,-2.45 3.01,2.45, height 1.63
TLMS1100-GS15-Footprint-1 [mil]
  rect 24x33 smd: 1(-33.5,0) 2(33.5,0)
  silkscreen extent -10,-22 10,23, body extent -31,-16 31,16, height 24
TPS2105DBVR-Footprint-1 [mm]
  rect 0.8x0.55 smd: 1(-1.275,0.95) 2(-1.275,0) 3(-1.275,-0.95) 4(1.275,-0.95) 5(1.275,0.95)
  silkscreen extent -1.62,-1.55 0.38,1.55, body extent -1.4,-1.45 1.4,1.45, height 1.2

## Part data
C1 C15: library part CMP-001-00076-2, "Ceramic Capacitor, Multilayer, Ceramic, 25V, 10% +Tol, 10% -Tol, X5R, 15% TC, 22uF, Surface Mount, 1210", Capacitor Type=Ceramic, Case/Package=1210, Max Operating Temperature=85°C, Min Operating Temperature=-55°C, Tolerance=10%, Mounting Technology="Surface Mount", Pins=2, RoHS Compliant=Yes
C2 C3 C4 C5 C6 C7 C8 C9 C10 C11 C12 C16 C17 C26 C28 C29 C32 C33 C34: library part CMP-001-00005-5, "0.1 µF ±10% 50V Ceramic Capacitor X7R 0603 (1608 Metric)", Capacitor Type=Ceramic, Case/Package=0603, Max Operating Temperature=125°C, Min Operating Temperature=-55°C, Voltage Rating=50V, Mounting Technology="Surface Mount", Pins=2
C13 C22 C27: library part CMP-001-00021-3, "1 µF ±10% 25V Ceramic Capacitor X7R 0603 (1608 Metric)", Capacitor Type=Ceramic, Case/Package=0603, Max Operating Temperature=125°C, Min Operating Temperature=-55°C, Rated DC Voltage (URdc)=25V, Tolerance=10%, Height=0.9mm, Mounting Technology="Surface Mount", Pins=2, RoHS Compliant=Yes, Voltage Rating=25V
C14: library part CMP-001-00010-4, "10 µF ±20% 6.3V Ceramic Capacitor X5R 0603 (1608 Metric)", Capacitor Type=Ceramic, Case/Package=0603, Max Operating Temperature=85°C, Min Operating Temperature=-55°C, Tolerance=20%, Voltage Rating=6.3V, Mounting Technology="Surface Mount", Pins=2, RoHS Compliant=Yes
C18 C19 C20 C21: library part CMP-001-00082-1, "Ceramic Capacitor, Multilayer, Ceramic, 25V, 10% +Tol, 10% -Tol, X5R, 15% TC, 4.7uF, Surface Mount, 0603", Capacitor Type=Ceramic, Case/Package=0603, Max Operating Temperature=85°C, Min Operating Temperature=-55°C, Mounting Technology="Surface Mount", Pins=2, RoHS Compliant=Yes
C23: library part CMP-001-00087-1, "Ceramic Capacitor, Multilayer, Ceramic, 6.3V, 20% +Tol, 20% -Tol, X5R, 15% TC, 220uF, Surface Mount, 1206", Capacitor Type=Ceramic, Case/Package=1206, Max Operating Temperature=85°C, Min Operating Temperature=-55°C, Rated DC Voltage (URdc)=6.3V, Mounting Technology="Surface Mount", Pins=2, RoHS Compliant=Yes
C24 C25: library part CMP-001-00069-1, "Ceramic Capacitor, Multilayer, Ceramic, 25V, 10% +Tol, 10% -Tol, X7R, 15% TC, 0.22uF, Surface Mount, 0603", Capacitor Type=Ceramic, Case/Package=0603, Max Operating Temperature=125°C, Min Operating Temperature=-55°C, Mounting Technology="Surface Mount", Pins=2, RoHS Compliant=Yes
C30 C31: library part CMP-001-00083-1, "Ceramic Capacitor, Multilayer, Ceramic, 50V, 5% +Tol, 5% -Tol, C0G, -/+30ppm/Cel TC, 0.000012uF, Surface Mount, 0603", Capacitor Type=Ceramic, Case/Package=0603, Max Operating Temperature=125°C, Min Operating Temperature=-55°C, Rated DC Voltage (URdc)=50V, Mounting Technology="Surface Mount", Pins=2, RoHS Compliant=Yes
C35 C36: library part CMP-001-00084-1, "Ceramic Capacitor, Multilayer, Ceramic, 25V, 5% +Tol, 5% -Tol, C0G, 30ppm/Cel TC, 0.000018uF, Surface Mount, 0402", Capacitor Type=Ceramic, Case/Package=0402, Max Operating Temperature=125°C, Min Operating Temperature=-55°C, Mounting Technology="Surface Mount", Pins=2, RoHS Compliant=Yes
D1: library part CMP-004-00029-2, "Diode Schottky 30V 1A 2-Pin SOD-323 T/R", Case/Package=None, Availability=Good, BuyPart=https://www.snapeda.com/parts/BAT760-7/Zetex/view-part/4817231/?ref=eda, Component Type=Standard, Design Item ID=BAT760-7, DigiKey-Purchase-URL=https://snapeda.com/shop?store=DigiKey&id=4817231, MF="Diodes Zetex", Mouser-Purchase-URL=https://snapeda.com/shop?store=Mouser&id=4817231, MP=BAT760-7, Pins=2, Price=None, SnapEDA_Link=https://www.snapeda.com/parts/BAT760-7/Zetex/view-part/4817231/?ref=snap, Source=BAT760-7.SchLib
D2 D3 D4: library part CMP-004-00030-1, "Trans Voltage Suppressor Diode, 174W, 5V V(RWM), Bidirectional, 1 Element, Silicon", Breakdown Voltage-Nom=5.6V, Clamping Voltage-Max=18.6V, Rep Pk Reverse Voltage-Max=5V, Diode Type="TRANS VOLTAGE SUPPRESSOR", Polarity=Bidirectional, Reach SVHC Compliant=Yes, RoHS Compliant=Yes
D5 D8: library part CMP-004-00031-1, "Rectifier Diode, Schottky, 1 Phase, 1 Element, 0.1A, 35V V(RRM), Silicon", Forward Voltage=450mV, Max Operating Temperature=125°C, Max Output current=100mA, Package Style="SMALL OUTLINEMeter", Diode Type=RECTIFIER, Pins=2, RoHS Compliant=Yes
D6: library part CMP-007-00006-1, "Single Color LED, Red, 1.6mm", RoHS Compliant=Yes
D7: library part CMP-007-00007-1, "Led, Orange, 80Mcd, 606Nm, 0603 Rohs Compliant: Yes"
D9: library part CMP-007-00008-1, "Single Color LED, Green, 1.6mm", RoHS Compliant=Yes
FB1 FB2: library part CMP-006-00012-1, "Ferrite Chip, 1 Function(s), 0.8A, 2 Pin(s)"
J1: library part CMP-002-00084-1, "USB-C (USB TYPE-C) USB 2.0 Receptacle Connector 24 (6+18 Dummy) Position Surface Mount, Right Angle; Through Hole", Case/Package=None, Check_prices=https://www.snapeda.com/parts/10171746-00021LF/Amphenol/view-part/?ref=eda, Component Type=Standard, Design Item ID=10171746-00021LF, MF=Amphenol, MP=10171746-00021LF, Pins=16, SnapEDA_Link=https://www.snapeda.com/parts/10171746-00021LF/Amphenol/view-part/?ref=snap, Source=10171746-00021LF.SchLib
J2: library part CMP-002-00068-1, "CONN HEADER R/A 8POS 3MM", Max Operating Temperature=105°C, Min Operating Temperature=-40°C, Connector Type=Power,Rectangular, Mounting Technology=Board, Pins=8, RoHS Compliant=Yes
JP1: library part CMP-002-00077-1, "Board Connector, 2 Contact(s), 1 Row(s), Male, Straight, 0.1 inch Pitch, Solder Terminal, Locking, Black Insulator, Plug", Max Operating Temperature=125°C, Min Operating Temperature=-40°C, Connector Type="BOARD CONNECTOR", Mounting Technology=Board, RoHS Compliant=Yes
Q1: library part CMP-013-00025-1, "Small Signal Field-Effect Transistor, 1.1A I(D), 60V, 1-Element, P-Channel, Silicon, Metal-oxide Semiconductor FET, TO-236", RoHS Compliant=Yes
Q2 Q3: library part CMP-013-00024-1, "NPN Signal Transistor, SOT-23"
R1 R2 R3 R4 R6 R11 R15 R16 R17 R21 R22 R23 R24: library part CMP-009-00002-2, "10 kOhms ±1% 0.1W, 1/10W Chip Resistor 0603 (1608 Metric) Automotive AEC-Q200 Thick Film", Case/Package=0603, Max Operating Temperature=155°C, Min Operating Temperature=-55°C, Power=100mW, Tolerance=1%, Voltage Rating=75V, Mounting Technology="Surface Mount", Pins=2
R5 R9 R10: library part CMP-009-00180-2, Case/Package=None, Availability=Unavailable, Component Type=Standard, Design Item ID=RCS060362R0FKEA, MP=RCS060362R0FKEA, Pins=2, Price=None, Source=RCS060362R0FKEA.SchLib
R7 R8: library part CMP-009-00044-3, "Fixed Resistor, Thin Film, 0.1W, 12000ohm, 75V, 0.1% +/-Tol, 25ppm/Cel, Surface Mount, 0603", Case/Package=0603, Max Operating Temperature=155°C, Min Operating Temperature=-55°C, Package Height=0.45mm, Power=100mW, Rated Temperature=85°C, Tolerance=0.1%, Working Voltage=75V, Mounting Technology="Surface Mount", RoHS Compliant=Yes
R12 R13 R14: library part CMP-009-00183-1, "Fixed Resistor, Metal Glaze/thick Film, 0.1W, 33ohm, 75V, 1% +/-Tol, 100ppm/Cel, Surface Mount, 0603", Case/Package=0603, Max Operating Temperature=155°C, Min Operating Temperature=-55°C, Power=100mW, Tolerance=1%, Working Voltage=75V, Mounting Technology="Surface Mount", Pins=2, RoHS Compliant=Yes
R18: library part CMP-009-00147-1, "2.2 kOhms ±1% 0.1W, 1/10W Chip Resistor 0603 (1608 Metric) Automotive AEC-Q200 Thick Film", Case/Package=0603, Max Operating Temperature=155°C, Min Operating Temperature=-55°C, Power=100mW, Tolerance=1%, Voltage Rating=75V, Mounting Technology="Surface Mount", Pins=2, RoHS Compliant=Yes
R19 R20: library part CMP-009-00163-1, "120 Ohms ±1% 0.1W, 1/10W Chip Resistor 0603 (1608 Metric) Automotive AEC-Q200 Thick Film", Case/Package=0603, Max Operating Temperature=155°C, Min Operating Temperature=-55°C, Power=100mW, Tolerance=1%, Mounting Technology="Surface Mount", Pins=2, RoHS Compliant=No
R25 R26 R27: library part CMP-009-00025-3, "0 Ohms Jumper Chip Resistor 0603 (1608 Metric) Automotive AEC-Q200 Thick Film", Case/Package=0603, Max Operating Temperature=155°C, Min Operating Temperature=-55°C, Voltage Rating=75V
SB1 SB2: library part CMP-011-00006-1, "Keypad Switch, 1 Switches, SPST, Momentary-tactile, 0.05A, 12VDC, 2.55N, 4 PCB Hole Cnt, Solder Terminal, Surface Mount-straight", Manufacturer Series=PTS645, Max Operating Temperature=60°C, Min Operating Temperature=-20°C, Mounting Technology="Surface Mount", RoHS Compliant=Yes, Switch Action=MOMENTARY, Switch Function=SPST, Switch Type=Keypad, Terminal Finish=Silver, Terminal Length=0.138inch, Termination=Solder
U1: library part CMP-020-00002-1, "Rx Txrx Mod Wifi Ext Ipex SMD"
U2: library part CMP-015-00005-2, "USB Bus Controller, CMOS, PQCC64", Case/Package=HVQCCN, Max Operating Temperature=85°C, Max Supply Voltage=1.98V, Min Operating Temperature=-40°C, Min Supply Voltage=1.62V, Nominal Supply Voltage=1.8V, Pins=64, RoHS Compliant=Yes
U3: library part CMP-019-00026-1, "Fixed Positive LDO Regulator, 3.3V, 1.3V Dropout, PDSO3", Case/Package=SOP, Dropout Voltage1-Max=1.3V, Output Current1-Max=1A, Output Voltage1-Max=3.399V, Output Voltage1-Min=3.201V, Output Voltage1-Nom=3.3V, Pins=3, RoHS Compliant=Yes
U4: library part CMP-011-00008-1, "Analog Circuit, 1 Func, 2 Channel, PDSO5", Case/Package=LSSOP, Max Operating Temperature=85°C, Min Operating Temperature=-40°C, Pins=5, RoHS Compliant=Yes, Throw Configuration="ANALOG CIRCUIT"
U5: library part CMP-016-00002-1
U6: library part CMP-019-00024-2, "EEPROM, 64X16, Serial, CMOS, PDSO8", Case/Package=HVSON, Clock Frequency=2MHz, Max Operating Temperature=85°C, Max Supply Voltage=5.5V, Min Operating Temperature=-40°C, Min Supply Voltage=4.5V, Operating Mode=SYNCHRONOUS, Package Shape=Rectangular, Density=1024b, Height - Seated (Max)=0.6mm, Length=3mm, Memory Format=EEPROM, Memory Size=64, Number of Words Code=64, Organization=64X16, Parallel/Serial=SERIAL, Pins=8, Serial Bus Type=3-WIRE
U7: library part CMP-00024-00007-1, "Bus Driver, AHC/VHC/H/U/V Series, 4-Func, 1-Bit, True Output, CMOS, PQCC14", Case/Package=HVQCCN, Max Operating Temperature=125°C, Max Supply Voltage=5.5V, Min Operating Temperature=-40°C, Min Supply Voltage=2V, Nominal Supply Voltage=3.3V, Package Style="CHIP CARRIER, HEAT SINK/SLUG, VERY THIN PROFILEMeter", Power Supplies=2/5.5V, Channels=4, Control Type="ENABLE LOW", Logic Type="BUS DRIVER", Max I(ol)=8mA, Number of Ports=2, Output Characteristics=3-STATE, Output Polarity=True, Pins=14, RoHS Compliant=Yes
U8 U9: library part CMP-015-00000-4, "3.3-V CAN Transceiver with CAN FD", Case/Package=SOIC, Max Operating Temperature=125°C, Min Operating Temperature=-40°C, Nominal Supply Voltage=3.3V, Pins=8, RoHS Compliant=Yes
U10: library part CMP-015-00008-1, "1 Channel(s), 8MBps, CMOS, PDCC14", RoHS Compliant=Yes
XTAL1: library part CMP-003-00001-1, "Parallel - Fundamental Quartz Crystal, 12MHz Nom", Frequency Stability=0.003%, Frequency Tolerance=30ppm, Load Capacitance=12pF, Max Operating Temperature=70°C, Min Operating Temperature=-20°C, Aging="3 PPM/YEAR", Crystal/Resonator Type="PARALLEL - FUNDAMENTAL", Drive Level=1uW, ESR=100, Mounting Technology="Surface Mount", RoHS Compliant=Yes
XTAL2: library part CMP-003-00003-1, "Crystal 20MHz ±20ppm (Tol) ±30ppm (Stability) 18pF FUND 80Ohm 4-Pin Ultra Mini-CSMD T/R"

## Via types
v1: diameter 0.6, hole 0.25, Top Layer to Bottom Layer, 136 vias
v2: diameter 0.4, hole 0.25, Top Layer to Bottom Layer, 40 vias
v3: diameter 0.6, hole 0.3, Top Layer to Bottom Layer, 10 vias
v4: diameter 0.5, hole 0.2, Top Layer to Bottom Layer, 5 vias
v5: diameter 0.5, hole 0.25, Top Layer to Bottom Layer, 2 vias